# EAGLE board PowerSO-36 (EAGLE 8.1.0)
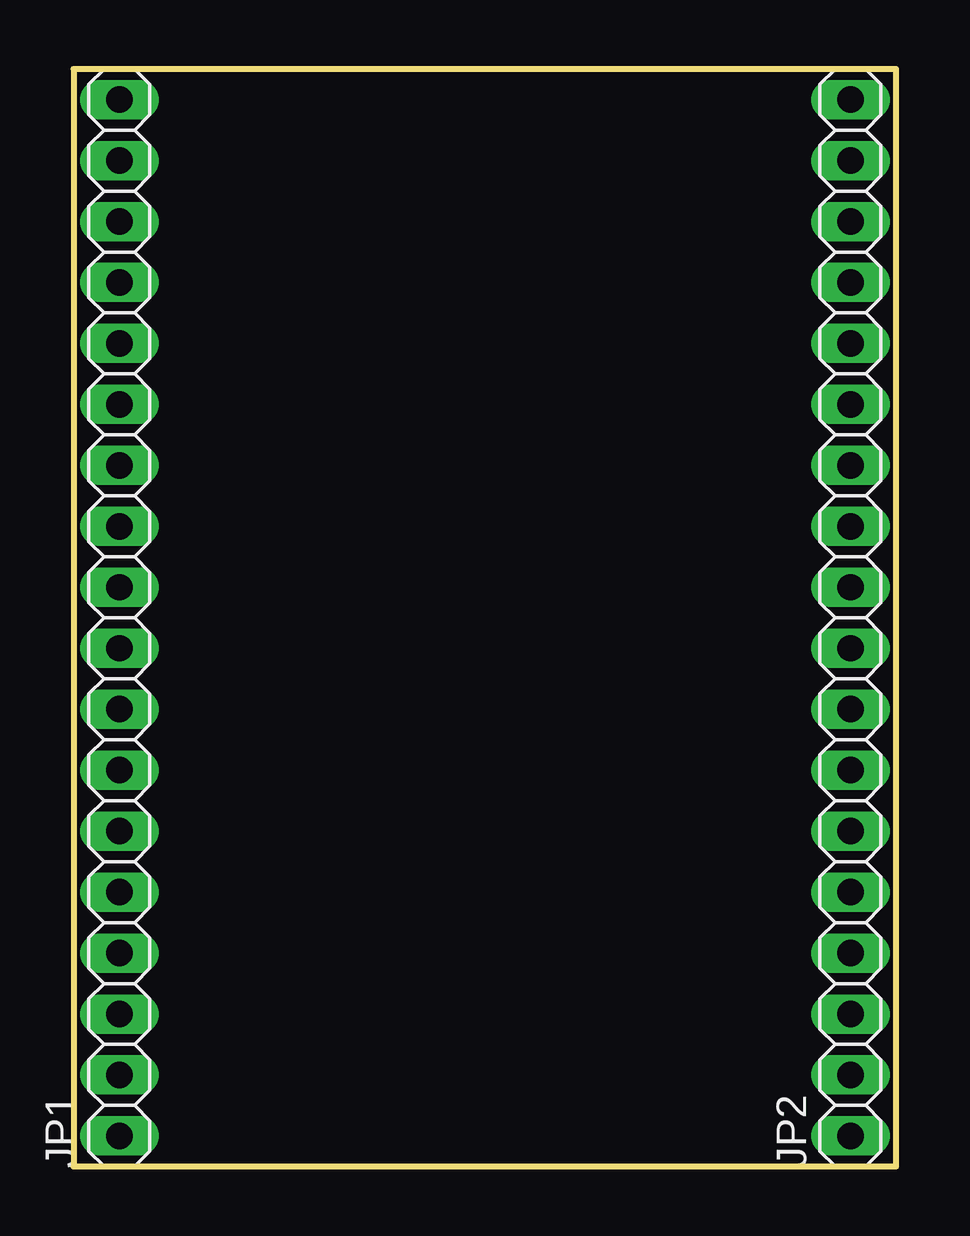
[diagram p0: board, top side]
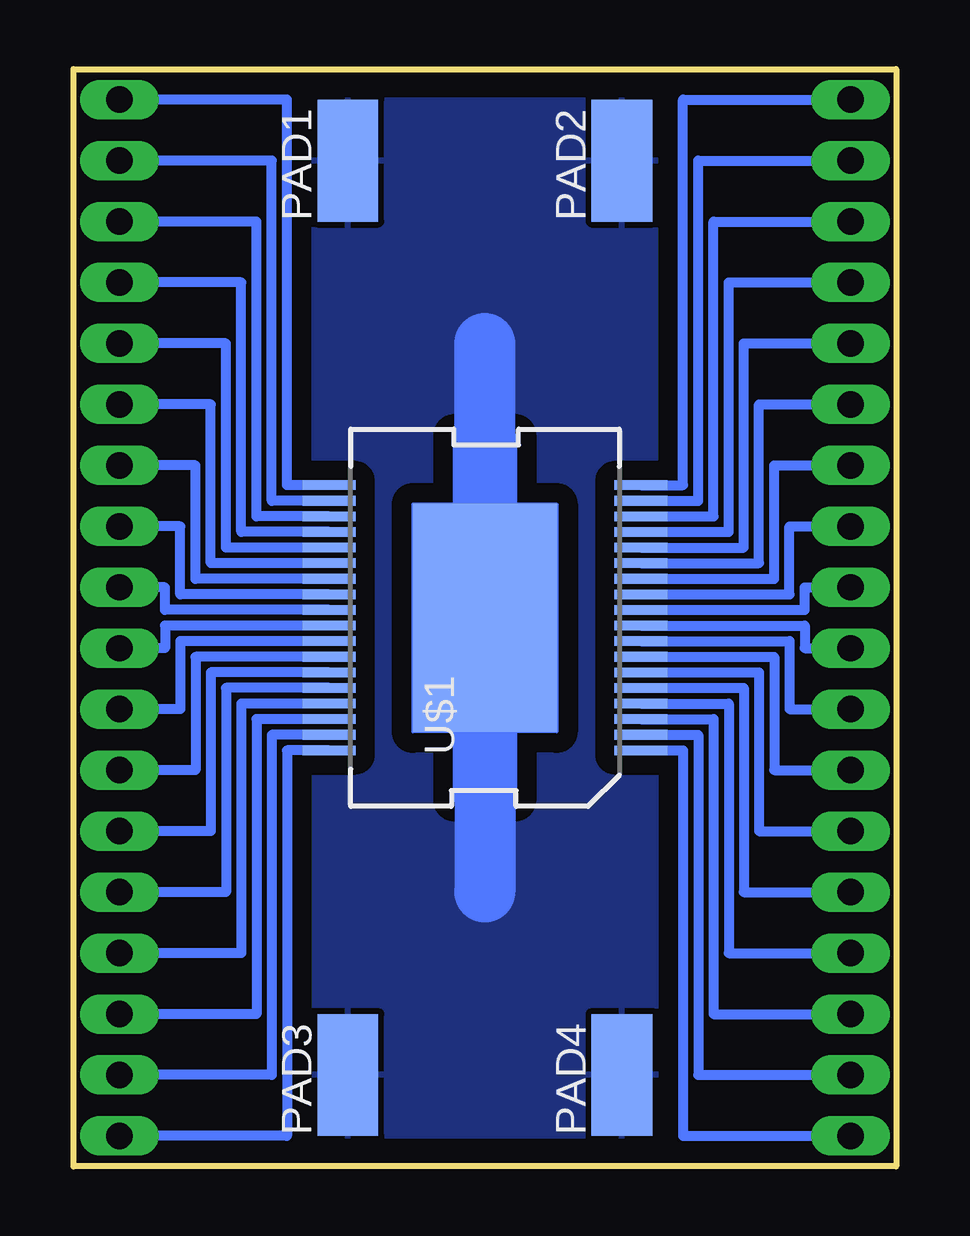
[diagram p1: board, bottom side, seen from below]

Size 34.29 x 45.72 mm. Coordinates in mm from the lower left corner, seen from the top.
Outline: 0,45.72 0,0 34.29,0 34.29,45.72 0,45.72
Copper layers (1*16): Top 0.035mm / dielectric 1.5mm / Bottom 0.035mm
Design rules "default": minimum track width 10mil, minimum drill 24mil, track to track 8mil, track to pad 8mil, pad to pad 8mil, via to via 8mil, smd to smd 8mil, copper to edge 40mil, drill to drill 8mil, minimum pad ring 10mil, minimum via ring 8mil, stop-mask expansion 4mil, vias tented up to drill 0mil, thermal gap 10mil

## Footprints (pad centres in the part's own frame; a part is rotated, then mirrored left to right if it is on the bottom)
1X18 = drill 1.1 long: 1 -21.59,0; 2 -19.05,0; 3 -16.51,0; 4 -13.97,0; 5 -11.43,0; 6 -8.89,0; 7 -6.35,0; 8 -3.81,0; 9 -1.27,0; 10 1.27,0; 11 3.81,0; 12 6.35,0; 13 8.89,0; 14 11.43,0; 15 13.97,0; 16 16.51,0; 17 19.05,0; 18 21.59,0
SMD2,54-5,08 = smd 2.54 x 5.08: 1 0,0
POWERSO-36 = smd 0.4 x 2.2: 1 -5.525,-6.5; 2 -4.875,-6.5; 3 -4.225,-6.5; 4 -3.575,-6.5; 5 -2.925,-6.5; 6 -2.275,-6.5; 7 -1.625,-6.5; 8 -0.975,-6.5; 9 -0.325,-6.5; 10 0.325,-6.5; 11 0.975,-6.5; 12 1.625,-6.5; 13 2.275,-6.5; 14 2.925,-6.5; 15 3.575,-6.5; 16 4.225,-6.5; 17 4.875,-6.5; 18 5.525,-6.5; 19 5.525,6.5; 20 4.875,6.5; 21 4.225,6.5; 22 3.575,6.5; 23 2.925,6.5; 24 2.275,6.5; 25 1.625,6.5; 26 0.975,6.5; 27 0.325,6.5; 28 -0.325,6.5; 29 -0.975,6.5; 30 -1.625,6.5; 31 -2.275,6.5; 32 -2.925,6.5; 33 -3.575,6.5; 34 -4.225,6.5; 35 -4.875,6.5; 36 -5.525,6.5 | smd 9.5 x 6: S 0,0

## Placement (x,y rotation side)
JP1  [1X18]  1.9,22.86 90 top
JP2  [1X18]  32.38,22.86 90 top
PAD1  [SMD2,54-5,08]  22.86,41.91 0 bottom
PAD2  [SMD2,54-5,08]  11.43,41.91 0 bottom
PAD3  [SMD2,54-5,08]  22.86,3.81 0 bottom
PAD4  [SMD2,54-5,08]  11.43,3.81 0 bottom
U$1  POWERSO36  [POWERSO-36]  17.14,22.86 90 bottom

## Library data of the parts
JP1 JP2 = pinhead
PAD1-PAD4 = wirepad
U$1 = Namenlos

## Nets
N$1: JP1.1 U$1.1
N$2: JP1.2 U$1.2
N$3: JP1.3 U$1.3
N$4: JP1.4 U$1.4
N$5: JP1.5 U$1.5
N$6: JP1.6 U$1.6
N$7: JP1.7 U$1.7
N$8: JP1.8 U$1.8
N$9: JP1.9 U$1.9
N$10: JP1.10 U$1.10
N$11: JP1.11 U$1.11
N$12: JP1.12 U$1.12
N$13: JP1.13 U$1.13
N$14: JP1.14 U$1.14
N$15: JP1.15 U$1.15
N$16: JP1.16 U$1.16
N$17: JP1.17 U$1.17
N$18: JP1.18 U$1.18
N$19: JP2.1 U$1.36
N$20: JP2.2 U$1.35
N$21: JP2.3 U$1.34
N$22: JP2.4 U$1.33
N$23: JP2.5 U$1.32
N$24: JP2.6 U$1.31
N$25: JP2.7 U$1.30
N$26: JP2.8 U$1.29
N$27: JP2.9 U$1.28
N$28: JP2.10 U$1.27
N$29: JP2.11 U$1.26
N$30: JP2.12 U$1.25
N$31: JP2.13 U$1.24
N$32: JP2.14 U$1.23
N$33: JP2.15 U$1.22
N$34: JP2.16 U$1.21
N$35: JP2.17 U$1.20
N$36: JP2.18 U$1.19
N$38: PAD1.1 PAD2.1 PAD3.1 PAD4.1

## Tracks (layer width: path | path; a pad name or v marks a point on that pad's centre or on a via)
N$1
  Bottom 0.406: U$1.1 8.89,17.34 8.89,1.27 JP1.1
N$2
  Bottom 0.406: U$1.2 8.25,17.98 8.25,3.81 JP1.2
N$3
  Bottom 0.406: U$1.3 7.62,18.64 7.62,6.35 JP1.3
N$4
  Bottom 0.406: U$1.4 6.98,19.29 6.98,8.89 JP1.4
N$5
  Bottom 0.406: U$1.5 6.35,19.93 6.35,11.43 JP1.5
N$6
  Bottom 0.406: U$1.6 5.71,20.59 5.71,13.97 JP1.6
N$7
  Bottom 0.406: U$1.7 5.08,21.23 5.08,16.51 JP1.7
N$8
  Bottom 0.406: U$1.8 4.45,21.89 4.45,19.05 JP1.8
N$9
  Bottom 0.406: U$1.9 3.81,22.54 3.81,21.59 JP1.9
N$10
  Bottom 0.406: U$1.10 3.81,23.18 3.81,24.13 JP1.10
N$11
  Bottom 0.406: U$1.11 4.45,23.84 4.45,26.67 JP1.11
N$12
  Bottom 0.406: U$1.12 5.08,24.48 5.08,29.21 JP1.12
N$13
  Bottom 0.406: U$1.13 5.71,25.14 5.71,31.75 JP1.13
N$14
  Bottom 0.406: U$1.14 6.35,25.79 6.35,34.29 JP1.14
N$15
  Bottom 0.406: U$1.15 6.98,26.43 6.98,36.83 JP1.15
N$16
  Bottom 0.406: U$1.16 7.62,27.09 7.62,39.37 JP1.16
N$17
  Bottom 0.406: U$1.17 8.25,27.73 8.25,41.91 JP1.17
N$18
  Bottom 0.406: U$1.18 8.89,28.39 8.89,44.45 JP1.18
N$19
  Bottom 0.406: U$1.36 25.4,17.34 25.4,1.27 JP2.1
N$20
  Bottom 0.406: U$1.35 26.04,17.98 26.04,3.81 JP2.2
N$21
  Bottom 0.406: U$1.34 26.67,18.64 26.67,6.35 JP2.3
N$22
  Bottom 0.406: U$1.33 27.3,19.29 27.3,8.89 JP2.4
N$23
  Bottom 0.406: U$1.32 27.94,19.93 27.94,11.43 JP2.5
N$24
  Bottom 0.406: U$1.31 28.58,20.59 28.58,13.97 JP2.6
N$25
  Bottom 0.406: U$1.30 29.21,21.23 29.21,16.51 JP2.7
N$26
  Bottom 0.406: U$1.29 29.84,21.89 29.84,19.05 JP2.8
N$27
  Bottom 0.406: U$1.28 30.48,22.54 30.48,21.59 JP2.9
N$28
  Bottom 0.406: U$1.27 30.48,23.18 30.48,24.13 JP2.10
N$29
  Bottom 0.406: U$1.26 29.84,23.84 29.84,26.67 JP2.11
N$30
  Bottom 0.406: U$1.25 29.21,24.48 29.21,29.21 JP2.12
N$31
  Bottom 0.406: U$1.24 28.58,25.14 28.58,31.75 JP2.13
N$32
  Bottom 0.406: U$1.23 27.94,25.79 27.94,34.29 JP2.14
N$33
  Bottom 0.406: U$1.22 27.3,26.43 27.3,36.83 JP2.15
N$34
  Bottom 0.406: U$1.21 26.67,27.09 26.67,39.37 JP2.16
N$35
  Bottom 0.406: U$1.20 26.04,27.73 26.04,41.91 JP2.17
N$36
  Bottom 0.406: U$1.19 25.4,28.39 25.4,44.45 JP2.18
N$38
  Bottom 2.54: 18.41,22.86 17.14,22.86 | 17.14,22.86 17.14,11.43 | 17.14,22.86 17.14,34.29
  pour Bottom (isolate 0.813): 0.63,44.45 33.66,44.45 33.66,1.27 0.63,1.27